# Altium PCB PCB_hEART-led_2026-04-25.pcbdoc
Units mil, origin at the board's own origin, x right, y up, seen from the top; angles counter-clockwise.
Board outline 9284.06 x 7509.06 mil, 2 copper layers (Top Layer, Bottom Layer); 10 components, 20 nets, 52 pads, 3 vias.
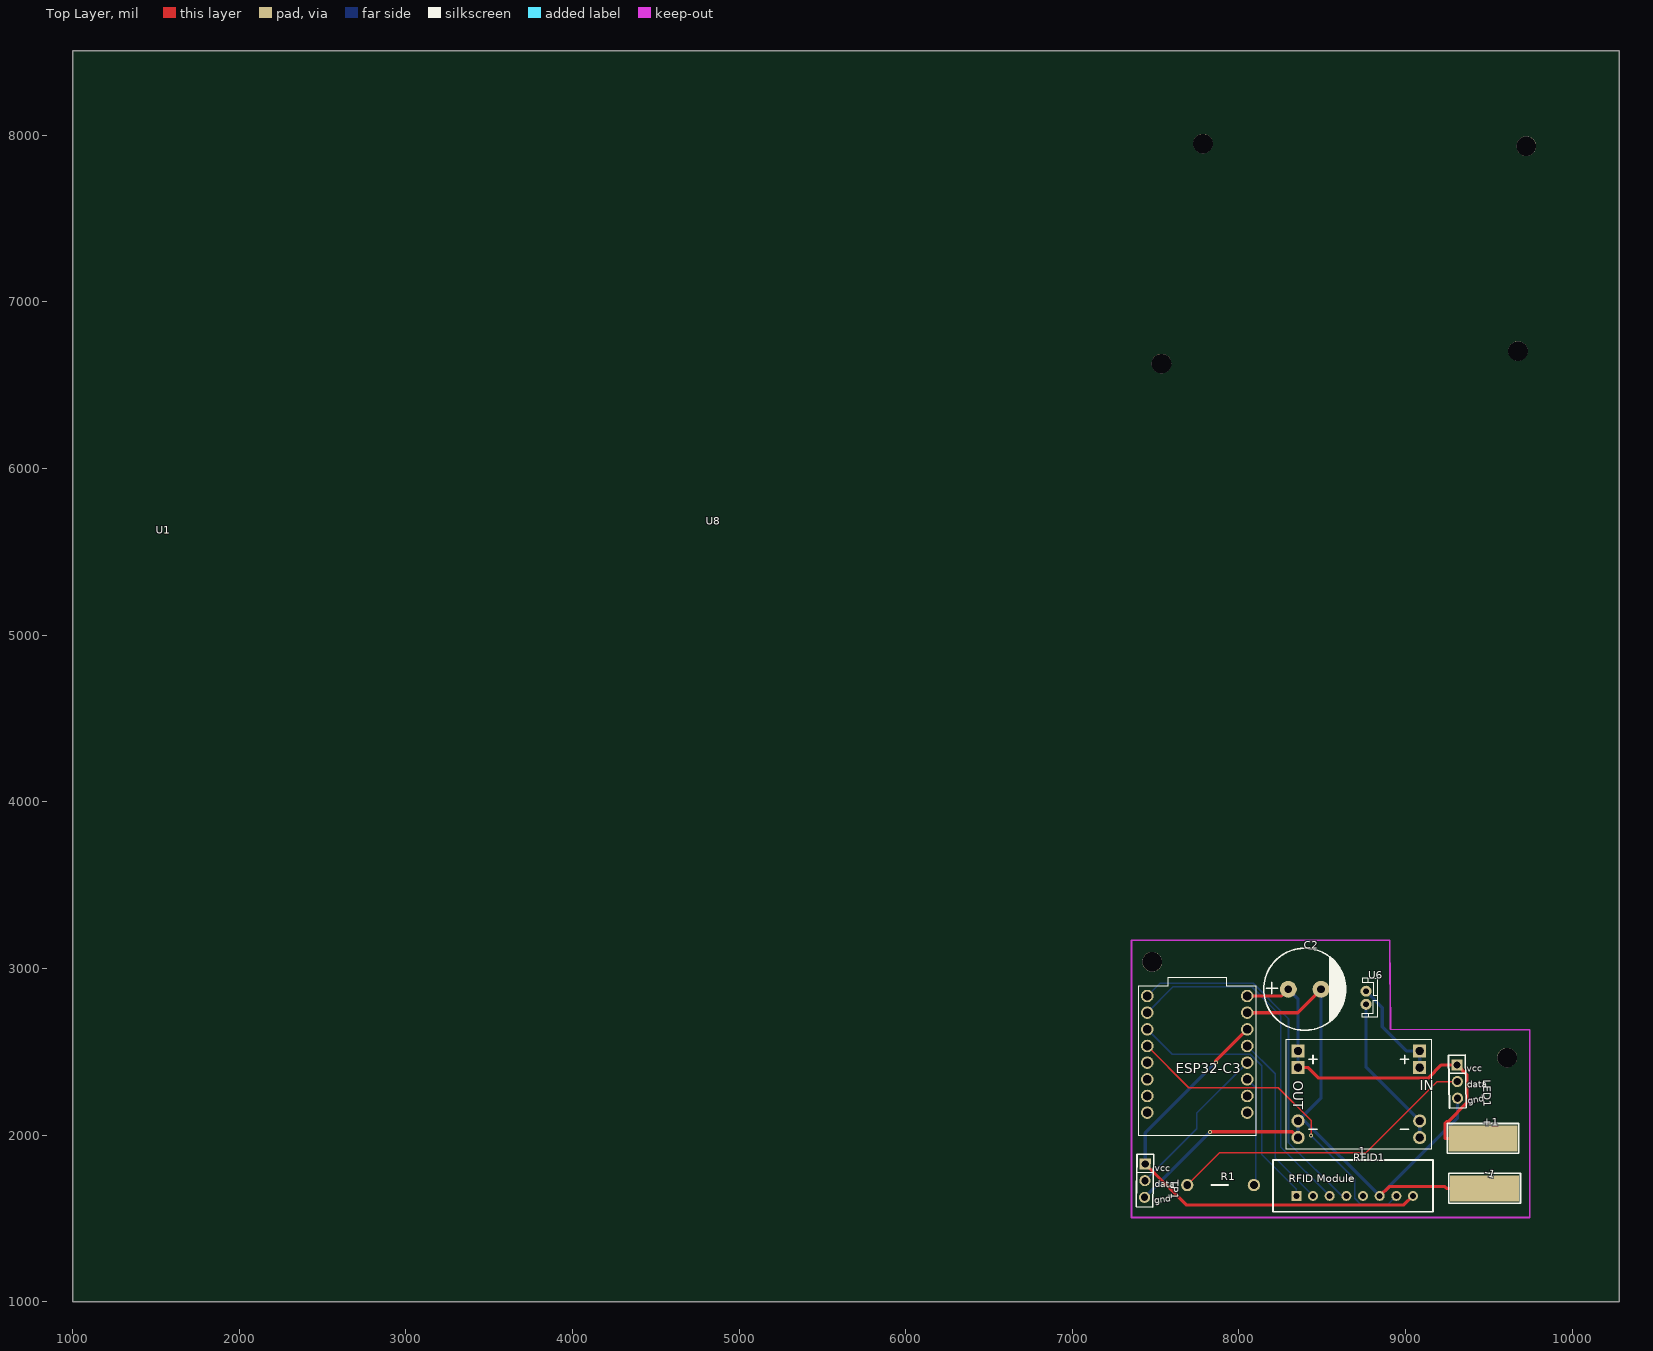
[diagram p0: Top Layer view]
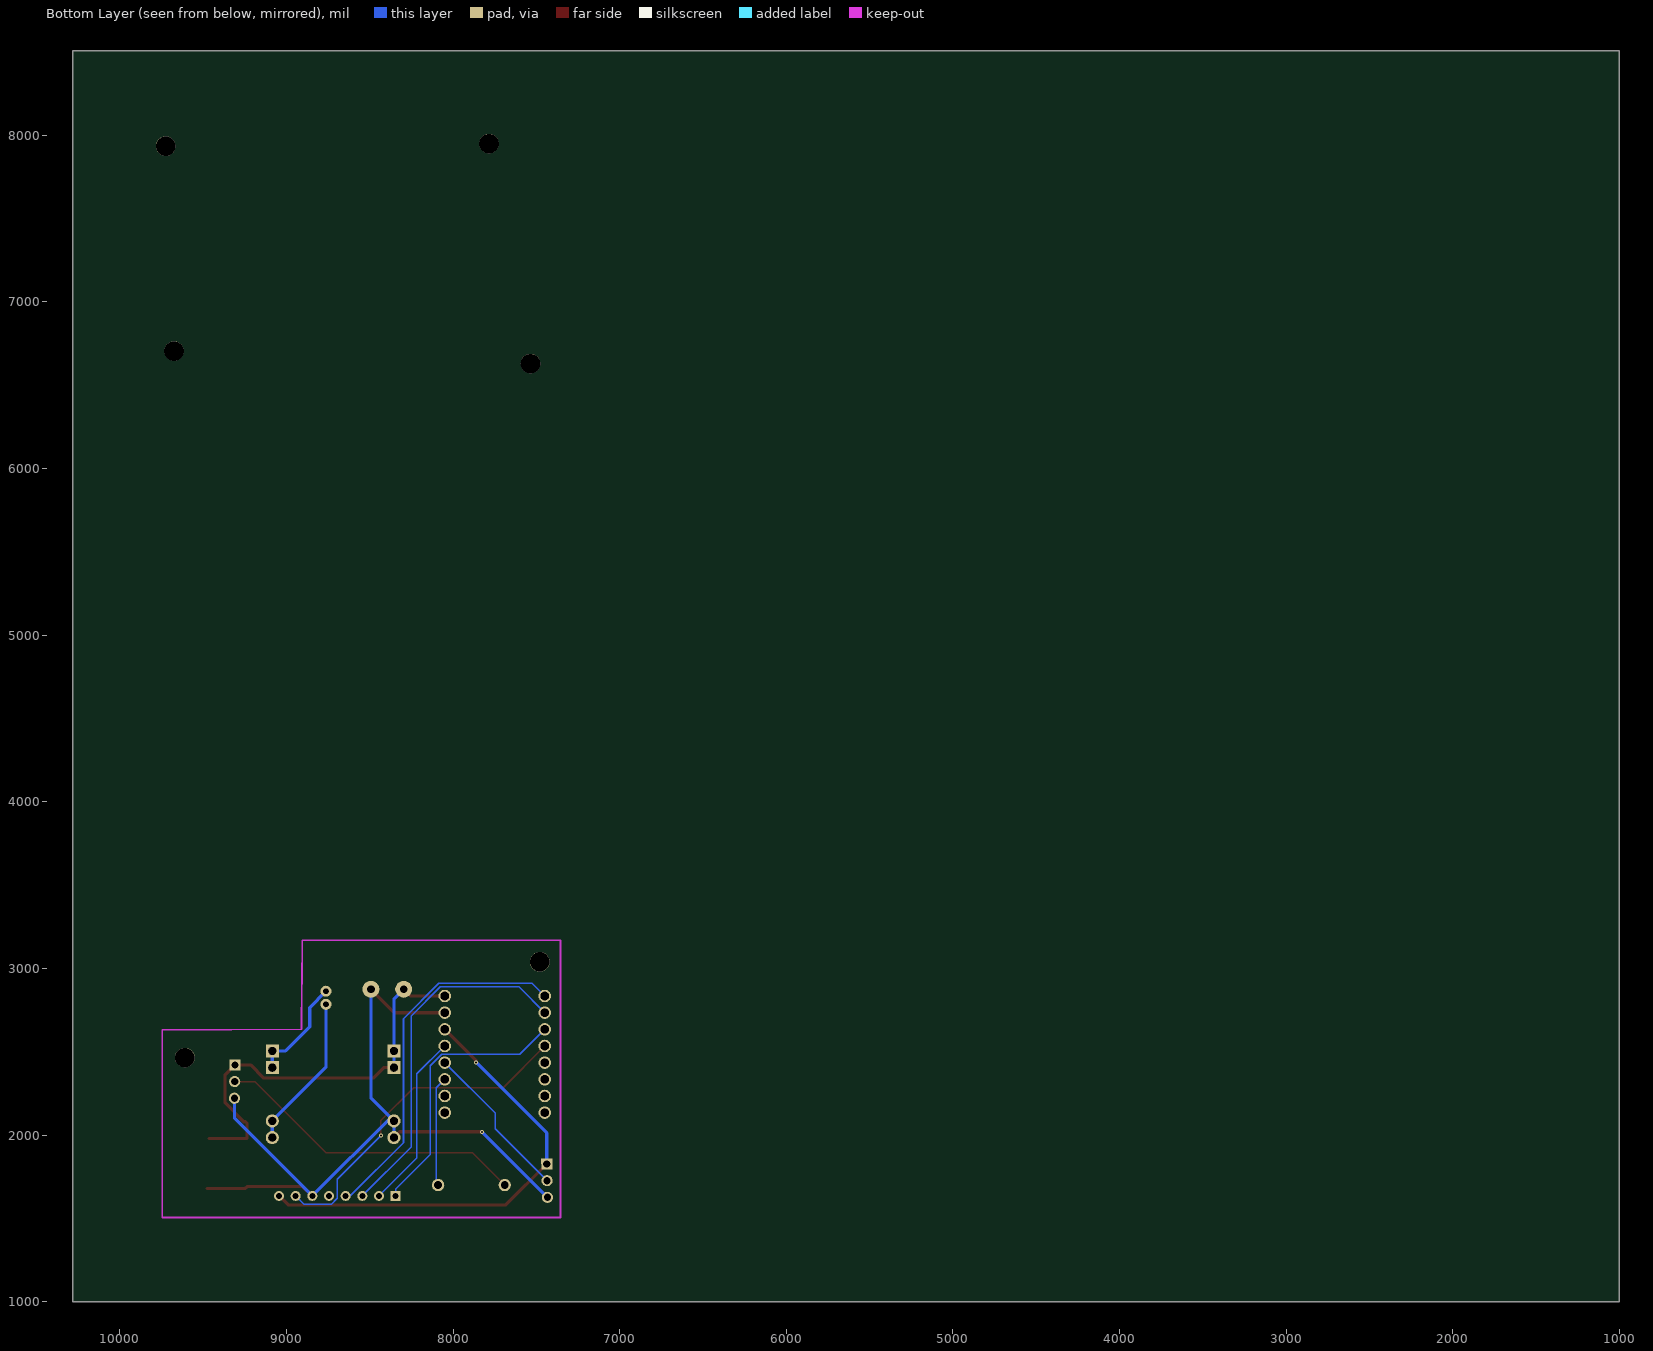
[diagram p1: Bottom Layer view, seen from below]

## Layer stack, top to bottom
Top Layer: signal copper (thickness not stored)
Dielectric: dielectric 12.6, FR-4, Dk 4.8
Bottom Layer: signal copper (thickness not stored)

## Board outline
10284.06,1000 1000,1000 1000,8509.06 10284.06,8509.06

## Components (designator, comment, footprint, x,y, rotation, side; value= is the part's Value field where it differs from the comment)
1 "DC-DC-STEP-DOWN-MP1584" DC-DC-STEP-DOWN-MP1584 8720,2245 r180 top
+1 "COPPER3.5X10" SMD_L10.0-W3.5 9465,1980 r0 top
-1 "COPPER3.5X10" SMD_L10.0-W3.5 9475,1680 r0 top
C2 "1000uF" SARAWUT_C1000UF 8395,2875 r0 top
LED1 "THREE PIN PINHEADER" "THREE PIN PINHEADER" 9320,2320 r271 top
R1 "ResistorToday" "FIXED RESISTOR" 7885,1700 r0 top
RFID1 "RC522 COPY" RFID-RC522 9045,1635 r0 top
TP1 "THREE PIN PINHEADER" "THREE PIN PINHEADER" 7445,1725 r269 top
U6 "JST PH2" JST-PH-JST-PH2 8735,2840 r0 top
U8 "ESP32C3-SuperMini" ESP32-C3_SUPERMINI:MODULE_ESP32-C3_SUPERMINI 7750,2445 r0 top

## Footprints (in the part's own frame and the unit in brackets; to place one, negate y for a bottom-side part, rotate by r counter-clockwise, add the part's x,y. Pads: shape width x height; smd on the part's side, far side on the other; paste and mask are expansions set on the pad)
DC-DC-STEP-DOWN-MP1584 [mil]
  rect 78.74x78.74 hole 47.24 slot 47.44 at 0 deg paste+0 mask+2: IN+.1(-365,-160) IN+.2(-365,-260) OUT+.1(365,-160) OUT+.2(365,-260)
  round 78.74 hole 47.24 slot 47.44 at 0 deg paste+0 mask+2: IN-.1(-365,260) IN-.2(-365,160) OUT-.1(365,260) OUT-.2(365,160)
  silkscreen extent -435,-330 435,330
ESP32-C3_SUPERMINI:MODULE_ESP32-C3_SUPERMINI [mil]
  round 75 hole 50 slot 50.2 at 0 deg paste+0 mask+2: 1(-300,389.76) 2(-300,289.76) 3(-300,189.76) 4(-300,89.76) 5(-300,-10.24) 6(-300,-110.24) 7(-300,-210.24) 8(-300,-310.24) 9(300,-310.24) 10(300,-210.24) 11(300,-110.24) 12(300,-10.24) 13(300,89.76) 14(300,189.76) 15(300,289.76) 16(300,389.76)
  silkscreen extent -354,-447 354,498
"FIXED RESISTOR" [mil]
  round 74 hole 47.2 paste+0 mask+2: 1(-195,0) 2(205,0)
  silkscreen extent -50,0 50,0
JST-PH-JST-PH2 [mil]
  round 66 hole 32 slot 32.2 at 90 deg paste+0 mask+2: 1(28.2,23.35) 2(28.2,-55.25)
  silkscreen extent 5,-132 95,100
RFID-RC522 [mil]
  round 60 hole 36 paste+0 mask+4: 1(0,0)
  round 60 hole 36 paste+0 mask+2: 2(-100,0) 3(-200,0) 4(-300,0) 5(-400,0) 6(-500,0) 7(-600,0)
  rect 60x60 hole 36 paste+0 mask+4: 8(-700,0)
  silkscreen extent -840,-95 120,215
SARAWUT_C1000UF [mm]
  round 2.6 hole 1.2 paste+0 mask+0.05: 1(-2.5,0) 2(2.5,0)
  silkscreen extent -6.25,-6.25 6.25,6.25
SMD_L10.0-W3.5 [mm]
  rect 10.5x4 smd paste+0 mask+0.05: 1(0,0)
  silkscreen extent -5.46,-2.29 5.46,2.29
"THREE PIN PINHEADER" [mm]
  rect 1.7x1.7 hole 1.1 paste+0 mask+0.051: 1(-2.572,-0.23)
  round 1.7 hole 1.1 paste+0 mask+0.051: 2(-0.032,-0.23) 3(2.508,-0.23)
  silkscreen extent -4.05,-1.5 3.99,1.04

## Free pads (board coordinates)
  round 118.11 hole 118.11 unplated paste+0: ""(7480,3040) ""(7535,6630) ""(7785,7950) ""(9610,2465) ""(9675,6705) ""(9725,7935)

## Via types
v1: diameter 24.02, hole 12.01, Top Layer to Bottom Layer, tented both sides, 3 vias

## Nets (pads, with @x,y where several pads share a name; then routed paths per layer and width w, separated by ;. In a path a pad name is that pad's centre, name@x,y a point inside that pad or via, vN(x,y) a via of type N, cw(c..) or ccw(c..) an arc to the next point about the centre after c; other vN are vias at no path point)
R1_1: LED1.2 R1.1 | length 1878.2
  Top Layer w10: R1.1 7883.48,1893.48 8763.27,1893.48 9190.89,2321.1 LED1.2
RFID1_1: RFID1.1 TP1.1 U8.14 | length 2793.6
  Top Layer w19.68: TP1.1 7683.52,1580.59 8990.59,1580.59 RFID1.1 ; v1(7861.47,2436.74) 7861.47,2446.23 U8.14
  Bottom Layer w19.68: TP1.1 7437.71,2012.98 v1(7861.47,2436.74)
RFID1_2: RFID1.2 U8.4 | length 2030.3
  Top Layer w10: U8.4 7699.99,2284.77 8236.44,2284.77 8433.68,2087.53 v1(8433.68,1996.18)
  Bottom Layer w10: v1(8433.68,1996.18) 8695.01,1734.85 8695.01,1620.77 8731.86,1583.92 8893.92,1583.92 RFID1.2
RFID1_3: 1.OUT-.1 1.OUT-.2 -1.1 C2.2 LED1.3 RFID1.3 TP1.3 U8.15 | length 4649.4
  Top Layer w19.68: v1(7827.56,2019.77) 8320.23,2019.77 1.OUT-.1 ; U8.15 8353.18,2734.76 C2.2 ; RFID1.3 8901.22,1691.22 9235.42,1691.22 9246.64,1680 -1.1
  Bottom Layer w19.68: TP1.3 v1(7827.56,2019.77) ; 1.OUT-.1 1.OUT-.2 1.OUT-.2@8375,2105 ; C2.2 8493.42,2223.42 1.OUT-.2@8375,2105 ; LED1.3 9312.67,2102.67 RFID1.3 1.OUT-.2@8375,2105
RFID1_4: RFID1.4
RFID1_5: RFID1.5 U8.1 | length 2191.1
  Bottom Layer w10: U8.1 7526.01,2910.77 8085.66,2910.77 8298.13,2698.3 8298.13,1953.66 8616.79,1635 RFID1.5
RFID1_6: RFID1.6 U8.2 | length 2139.3
  Bottom Layer w10: U8.2 7604.81,2889.57 8076.56,2889.57 8251.86,2714.27 8251.86,1928.14 RFID1.6
RFID1_7: RFID1.7 U8.13 | length 1063.4
  Bottom Layer w10: U8.13 8217.49,2367.27 8217.49,1862.51 RFID1.7
RFID1_8: RFID1.8 U8.3 | length 1645.1
  Bottom Layer w10: U8.3 7600,2484.76 8068.81,2484.76 8137.74,2415.83 8137.74,1883.25 8345,1675.99 RFID1.8
U6_1: 1.IN+.1 1.IN+.2 U6.1 | length 638.2
  Bottom Layer w19.68: U6.1 8861.17,2765.38 8861.17,2649.43 9005.6,2505 1.IN+.2 1.IN+.1
U6_2: 1.IN-.1 1.IN-.2 U6.2 | length 933
  Bottom Layer w19.68: U6.2 8763.2,2406.8 1.IN-.2 1.IN-.1
U8_5: U8.5
U8_6: U8.6
U8_7: U8.7
U8_8: U8.8
U8_9: U8.9
U8_10: U8.10
U8_11: R1.2 U8.11 | length 660.9
  Bottom Layer w10: U8.11 8101.54,2283.22 8101.54,1711.54 R1.2
U8_12: TP1.2 U8.12 | length 962.7
  Bottom Layer w10: TP1.2 7747.81,2038.27 7747.81,2132.57 U8.12
U8_16: 1.OUT+.1 1.OUT+.2 +1.1 C2.1 LED1.1 U8.16 | length 2523.8
  Top Layer w19.68: U8.16 8256.33,2834.76 C2.1 ; 1.OUT+.1 8416.04,2405 8478.63,2342.41 9136.79,2342.41 9215.47,2421.09 LED1.1 9368.83,2361.43 9368.83,2193.56 9255.68,2080.41 9247.52,2080.41 9236.64,2069.53 9236.64,1980 +1.1
  Bottom Layer w19.68: C2.1 8355,2816.57 1.OUT+.2 1.OUT+.1

## Text inside footprints (layer, text, board x,y; h text height)
1: Top Overlay "IN" at 9085,2269 h60; Top Overlay "OUT" at 8325,2326 h60 r270
LED1: Top Overlay "vcc" at 9368.94,2381.18 h39.37 r1; Top Overlay "data" at 9370.65,2282.76 h39.37 r1; Top Overlay "gnd" at 9375.45,2184.65 h39.37 r10
RFID1: Top Overlay "RFID Module" at 8300,1700 h80
TP1: Top Overlay "vcc" at 7496.05,1784.43 h39.37 r359; Top Overlay "data" at 7494.33,1686.02 h39.37 r359; Top Overlay "gnd" at 7495.69,1587.8 h39.37 r8
U8: Top Overlay "U1" at 1500,5610 h45; Top Overlay "ESP32-C3" at 7620,2370 h59.06